# Altium PCB smucF.PcbDoc
Units mm, origin at the board's own origin, x right, y up, seen from the top; angles counter-clockwise.
Board outline 49.53 x 193.04 mm, 2 copper layers (Top, Bottom), stack 1.67 mm thick; 44 components, 97 nets, 390 pads, 152 vias.
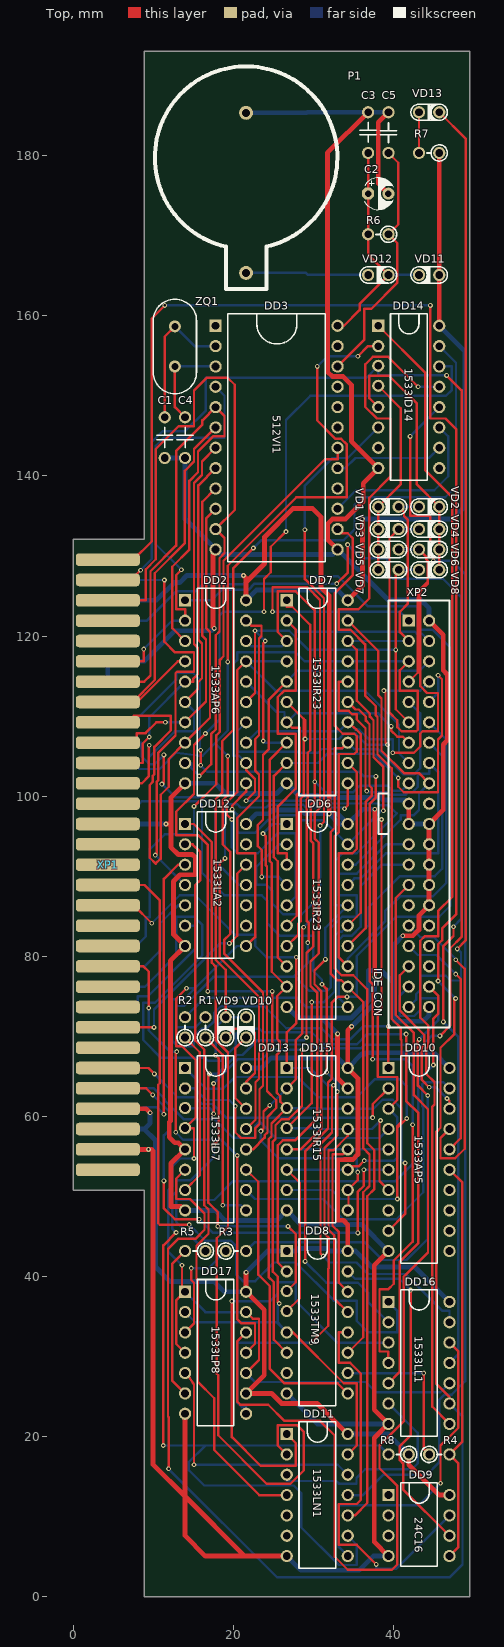
[diagram p0: Top view]
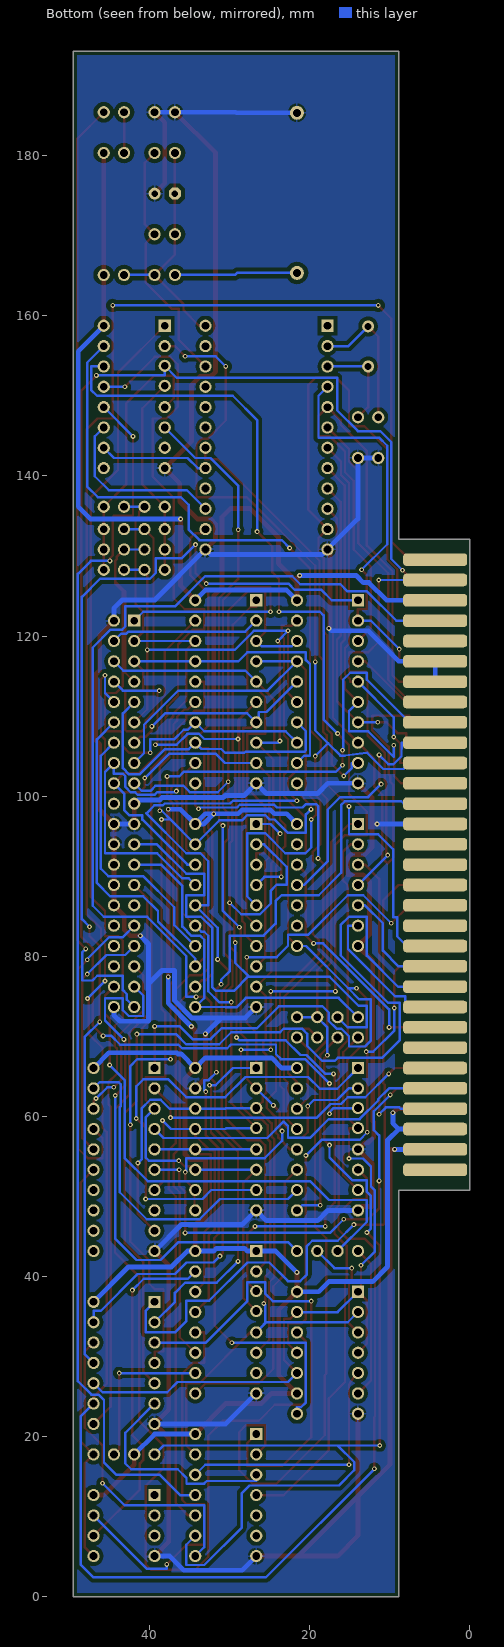
[diagram p1: Bottom view, seen from below]

## Layer stack, top to bottom
Top Solder: solder mask 0.01, Solder Resist, Dk 3.5
Top: signal copper 0.035
Dielectric 1: dielectric 1.6, FR-4, Dk 4.8
Bottom: signal copper 0.035
Bottom Solder: solder mask 0.01, Solder Resist, Dk 3.5

## Board outline
0,50.8 8.89,50.8 8.89,0 49.53,0 49.53,193.04 8.89,193.04 8.89,132.08 0,132.08 0,118.872 0,117.348

## Design rules (kind name [scope] priority, off if disabled: settings)
Clearance [All] p1: gap=0.2 except(0.5: Arc-Poly Track-Poly SMDPad-Poly THPad-Poly Via-Poly Fill-Poly Poly-Poly)
ComponentClearance DG126 [HasFootprint('DG126') vs HasFootprint('DG126')] p1: gap=-1 collisioncheckmode=3 verticalgap=0.2 showdistances=FALSE
ComponentClearance [All] p2: gap=0.3 collisioncheckmode=3 verticalgap=0.2 showdistances=FALSE
HoleSize [All] p1: absolutevalues=TRUE maxlimit=6.3 minlimit=0.2 maxpercent=80.000 minpercent=20.000
HoleToHoleClearance [All] p1: gap=0.4 allowstackedmicrovias=TRUE
MinimumSolderMaskSliver [All] p1: minsoldermaskwidth=0.1
PlaneConnect Via_Plane_Connect [(ObjectKind = 'Via')] p1: planeconnectstyle=Direct reliefexpansion=0.508 reliefentries=4 reliefconductorwidth=0.254 reliefairgap=0.254
PlaneConnect [All] p2: planeconnectstyle=Relief reliefexpansion=0.508 reliefentries=4 reliefconductorwidth=0.254 reliefairgap=0.254
PolygonConnect Via_Poly_Connect [(ObjectKind = 'Via')] p1: connectstyle=Direct reliefconductorwidth=0.254 reliefentries=4 polygonreliefangle="90 Angle" airgapwidth=0.254
PolygonConnect [All] p2: connectstyle=Relief reliefconductorwidth=0.254 reliefentries=4 polygonreliefangle="90 Angle" airgapwidth=0.254
RoutingVias [All] p1: holewidth=0.3 width=0.6 viastyle="Through Hole" minholewidth=0.3 minwidth=0.6 maxholewidth=0.3 maxwidth=0.6
SilkToSilkClearance [All] p1: silktosilkclearance=0.1
SilkToSolderMaskClearance [IsPad] p1: minsilkscreentomaskgap=0.1 clearancetoexposedcopper=TRUE
SolderMaskExpansion [All] p1: expansion=0.102
Width Width_2 [InNet('GND')] p1: maxlimit=0.6 minlimit=0.6 preferedwidth=0.6
Width [InNet('+5V')] p2: maxlimit=0.6 minlimit=0.6 preferedwidth=0.6
Width Width_3 [InNet('+12V')] p3: maxlimit=1 minlimit=1 preferedwidth=1
Width Width_1 [All] p4: maxlimit=0.3 minlimit=0.3 preferedwidth=0.3
23 further rules are at their usual default settings.

## Components (designator, comment, footprint, x,y, rotation, side; value= is the part's Value field where it differs from the comment)
C1 "K10-17_75" K10-17_75 11.43,147.32 r270 top
C2 "" El-d4-h7-F2.54 38.1,175.26 r180 top
C3 "K10-17_75" K10-17_75 36.83,185.42 r270 top
C4 "K10-17_75" K10-17_75 13.97,147.32 r270 top
C5 "K10-17_75" K10-17_75 39.37,180.34 r90 top
DD2 "1533AP6" DIP20 13.97,124.46 r0 top
DD3 "512VI1" DIP24_15 17.78,158.75 r0 top
DD6 "1533IR23" DIP20 26.67,96.52 r0 top
DD7 "1533IR23" DIP20 26.67,124.46 r0 top
DD8 "1533TM9" DIP16 26.67,43.18 r0 top
DD9 "24C16" DIP8 39.37,12.7 r0 top
DD10 "1533AP5" DIP20 39.37,66.04 r0 top
DD11 "1533LN1" DIP14 26.67,20.32 r0 top
DD12 "1533LA2" DIP14 13.97,96.52 r0 top
DD13 "1533ID7" DIP16 13.97,66.04 r0 top
DD14 "1533ID14" DIP16 38.1,158.75 r0 top
DD15 "1533IR15" DIP16 26.67,66.04 r0 top
DD16 "1533LL1" DIP14 39.37,36.83 r0 top
DD17 "1533LP8" DIP14 13.97,38.1 r0 top
P1 "BAT" BH810 21.59,165.354 r180 top
R1 "R0125-2_5" R0125-2_5 16.51,72.39 r270 top
R2 "R0125-2_5" R0125-2_5 13.97,72.39 r270 top
R3 "R0125-2_5" R0125-2_5 21.59,43.18 r180 top
R4 "R0125-2_5" R0125-2_5 46.99,17.78 r180 top
R5 "R0125-2_5" R0125-2_5 13.97,43.18 r0 top
R6 "R0125-2_5" R0125-2_5 36.83,170.18 r0 top
R7 "R0125-2_5" R0125-2_5 43.18,180.34 r0 top
R8 "R0125-2_5" R0125-2_5 39.37,17.78 r0 top
VD1 "KD522-2_5" KD522-2_5 40.64,136.144 r180 top
VD2 "KD522-2_5" KD522-2_5 43.18,136.144 r0 top
VD3 "KD522-2_5" KD522-2_5 40.64,133.35 r180 top
VD4 "KD522-2_5" KD522-2_5 43.18,133.35 r0 top
VD5 "KD522-2_5" KD522-2_5 40.64,130.81 r180 top
VD6 "KD522-2_5" KD522-2_5 43.18,130.81 r0 top
VD7 "KD522-2_5" KD522-2_5 40.64,128.27 r180 top
VD8 "KD522-2_5" KD522-2_5 43.18,128.27 r0 top
VD9 "KD522-2_5" KD522-2_5 19.05,72.39 r270 top
VD10 "KD522-2_5" KD522-2_5 21.59,72.39 r270 top
VD11 "KD522-2_5" KD522-2_5 45.72,165.1 r180 top
VD12 "KD522-2_5" KD522-2_5 36.83,165.1 r0 top
VD13 "LED" KD522-2_5 43.18,185.42 r0 top
XP1 "SCORP EDGE" SCORPION 4.318,129.54 r0 top
XP2 "IDE_CON" IDE_CON 41.91,121.92 r0 top
ZQ1 "RK169MD" RK169MD 12.7,153.67 r90 top

## Footprints (in the part's own frame and the unit in brackets; to place one, negate y for a bottom-side part, rotate by r counter-clockwise, add the part's x,y. Pads: shape width x height; smd on the part's side, far side on the other; paste and mask are expansions set on the pad)
BH810 [mm]
  round 1.75 hole 1: 1(0,0) 2(0,-20)
  silkscreen extent -11.4,-25.8 11.4,2, body extent -11.5,-25.61 11.5,2.39, height 8.5
DIP8 [mil]
  rect 60x60 hole 38: 1(0,0)
  round 60 hole 38: 2(0,-100) 3(0,-200) 4(0,-300) 5(300,-300) 6(300,-200) 7(300,-100) 8(300,0)
  silkscreen extent 60,-350 240,60
DIP14 [mil]
  rect 60x60 hole 38: 1(0,0)
  round 60 hole 38: 2(0,-100) 3(0,-200) 4(0,-300) 5(0,-400) 6(0,-500) 7(0,-600) 8(300,-600) 9(300,-500) 10(300,-400) 11(300,-300) 12(300,-200) 13(300,-100) 14(300,0)
  silkscreen extent 60,-660 240,60
DIP16 [mil]
  rect 60x60 hole 38: 1(0,0)
  round 60 hole 38: 2(0,-100) 3(0,-196.85) 4(0,-295.28) 5(0,-400) 6(0,-500) 7(0,-600) 8(0,-700) 9(300,-700) 10(300,-600) 11(300,-500) 12(300,-400) 13(300,-300) 14(300,-200) 15(300,-100) 16(300,0)
  silkscreen extent 60,-760 240,60
DIP20 [mil]
  rect 60x60 hole 38: 1(0,0)
  round 60 hole 38: 2(0,-100) 3(0,-200) 4(0,-300) 5(0,-400) 6(0,-500) 7(0,-600) 8(0,-700) 9(0,-800) 10(0,-900) 11(300,-900) 12(300,-800) 13(300,-700) 14(300,-600) 15(300,-500) 16(300,-400) 17(300,-300) 18(300,-200) 19(300,-100) 20(300,0)
  silkscreen extent 60,-960 240,60
DIP24_15 [mil]
  rect 60x60 hole 38: 1(0,0)
  round 60 hole 38: 2(0,-100) 3(0,-200) 4(0,-300) 5(0,-400) 6(0,-500) 7(0,-600) 8(0,-700) 9(0,-800) 10(0,-900) 11(0,-1000) 12(0,-1100) 13(600,-1100) 14(600,-1000) 15(600,-900) 16(600,-800) 17(600,-700) 18(600,-600) 19(600,-500) 20(600,-400) 21(600,-300) 22(600,-200) 23(600,-100) 24(600,0)
  silkscreen extent 60,-1160 540,60
El-d4-h7-F2.54 [mm]
  oct 1.5x1.5 hole 0.8: 1(1.27,0)
  round 1.5 hole 0.8: 2(-1.27,0)
  silkscreen extent -1.93,-2 1.75,2, body extent -2.03,-2.03 2.03,2.03, height 7.27
IDE_CON [mil]
  rect 60x60 hole 37.99: 1(0,0)
  round 60 hole 37.99: 2(100,0) 3(0,-100) 4(100,-100) 5(0,-200) 6(100,-200) 7(0,-300) 8(100,-300) 9(0,-400) 10(100,-400) 11(0,-500) 12(100,-500) 13(0,-600) 14(100,-600) 15(0,-700) 16(100,-700) 17(0,-800) 18(100,-800) 19(0,-900) 20(100,-900) 21(0,-1000) 22(100,-1000) 23(0,-1100) 24(100,-1100) 25(0,-1200) 26(100,-1200) 27(0,-1300) 28(100,-1300) 29(0,-1400) 30(100,-1400) 31(0,-1500) 32(100,-1500) 33(0,-1600) 34(100,-1600) 35(0,-1700) 36(100,-1700) 37(0,-1800) 38(100,-1800) 39(0,-1900) 40(100,-1900)
  silkscreen extent -150,-2000 200,100
K10-17_75 [mil]
  round 60 hole 38: 1(0,0) 2(200,0)
  silkscreen extent 50,-40 148,40
KD522-2_5 [mil]
  round 60 hole 38: 1(0,0) 2(100,0)
  silkscreen extent -40,-40 140,40
R0125-2_5 [mil]
  round 60 hole 38: 1(0,0) 2(100,0)
  silkscreen extent 40,-40 140,40
RK169MD [mm]
  round 1.5 hole 0.9: 1(0,0) 2(5,0)
  silkscreen extent -3.4,-2.7 8.4,2.7
SCORPION [mm]
  rrect50% 8x1.57 smd far side: 1(0,0) 2(0,-2.54) 3(0,-5.08) 4(0,-7.62) 5(0,-10.16) 6(0,-12.7) 7(0,-15.24) 8(0,-17.78) 9(0,-20.32) 10(0,-22.86) 11(0,-25.4) 12(0,-27.94) 13(0,-30.48) 14(0,-33.02) 15(0,-35.56) 16(0,-38.1) 17(0,-40.64) 18(0,-43.18) 19(0,-45.72) 20(0,-48.26) 21(0,-50.8) 22(0,-53.34) 23(0,-55.88) 24(0,-58.42) 25(0,-60.96) 26(0,-63.5) 27(0,-66.04) 28(0,-68.58) 29(0,-71.12) 30(0,-73.66) 31(0,-76.2)
  rrect50% 8x1.57 smd: 32(0,0) 33(0,-2.54) 34(0,-5.08) 35(0,-7.62) 36(0,-10.16) 37(0,-12.7) 38(0,-15.24) 39(0,-17.78) 40(0,-20.32) 41(0,-22.86) 42(0,-25.4) 43(0,-27.94) 44(0,-30.48) 45(0,-33.02) 46(0,-35.56) 47(0,-38.1) 48(0,-40.64) 49(0,-43.18) 50(0,-45.72) 51(0,-48.26) 52(0,-50.8) 53(0,-53.34) 54(0,-55.88) 55(0,-58.42) 56(0,-60.96) 57(0,-63.5) 58(0,-66.04) 59(0,-68.58) 60(0,-71.12) 61(0,-73.66) 62(0,-76.2)

## Part data
C2: library part K50-35_75PNT
P1: library part "Header 2"
VD13: library part KD522-2_5
XP1: library part "SCOR EDGE"

## Via types
v1: diameter 0.6, hole 0.3, Top to Bottom, tented both sides, 152 vias

## Nets (pads, with @x,y where several pads share a name; then routed paths per layer and width w, separated by ;. In a path a pad name is that pad's centre, name@x,y a point inside that pad or via, vN(x,y) a via of type N, cw(c..) or ccw(c..) an arc to the next point about the centre after c; other vN are vias at no path point)
+5V: DD2.20 DD6.20 DD7.20 DD8.1 DD8.16 DD9.8 DD10.20 DD11.14 DD12.14 DD13.16 DD14.16 DD15.16 DD16.14 DD17.9 DD17.14 R7.2 R8.2 VD11.1 XP1.3 XP1.29 XP1.59 | length 388.1
  Top w0.6: XP1.59 9.093,60.96 v1(9.601,60.452) ; v1(21.26,127.559) 21.59,127.229 21.59,126.746 ; v1(21.59,40.513) DD17.14 23.852,35.838 23.852,27.662 DD17.9 24.765,25.4 26.027,24.138 30.472,24.138 DD11.14 ; DD2.20 21.59,126.746 ; v1(31.975,97.777) 31.975,125.048 30.937,126.086 30.937,134.874 29.88,135.932 27.464,135.932 23.901,132.37 23.901,129.057 21.59,126.746 ; DD8.16 34.29,46.482 33.757,47.015 33.028,47.015 33.028,54.585 33.833,54.585 33.858,54.61 34.925,54.61 35.56,55.245 35.56,64.77 DD15.16 34.29,70.744 v1(34.773,71.226) ; DD7.20 36.119,126.289 v1(36.119,134.62) ; v1(37.668,77.419) v1(37.668,98.374) ; R8.2 41.91,16.51 45.72,12.7 DD9.8 ; DD14.16 VD11.1 R7.2
  Bottom w0.6: XP1.29 8.89,58.42 ; XP1.3 10.389,124.46 12.598,126.67 13.31,126.67 14.199,127.559 v1(21.26,127.559) ; v1(9.601,60.452) 9.601,59.131 8.89,58.42 ; DD17.14 18.872,38.1 17.602,39.37 12.141,39.37 10.262,41.25 10.262,57.048 8.89,58.42 ; v1(21.59,40.513) 24.257,43.18 DD8.1 27.795,43.18 28.126,43.511 31.67,43.511 32.002,43.18 DD8.16 35.274,43.18 37.268,41.186 42.634,41.186 DD16.14 ; DD13.16 23.47,66.04 24.74,67.31 33.02,67.31 DD15.16 36.052,67.802 36.43,67.802 36.578,67.95 45.08,67.95 DD10.20 ; DD12.14 22.86,97.79 24.416,97.79 24.908,98.282 28.432,98.282 28.924,97.79 33.02,97.79 DD6.20 ; DD2.20 22.86,125.73 33.02,125.73 DD7.20 ; v1(31.975,97.777) 33.233,96.52 DD6.20 ; DD11.14 39.37,20.32 R8.2 ; v1(34.773,71.226) 37.668,74.122 v1(37.668,77.419) ; v1(36.119,134.62) 47.379,134.62 48.903,136.144 48.903,155.567 DD14.16 ; v1(37.668,98.374) 36.144,98.374 DD6.20
/DOS: DD16.2 XP1.4 | length 153.2
  Top w0.3: v1(28.956,41.885) 28.956,55.62 31.819,58.483 31.819,64.244 32.309,64.733 32.309,74.219 33.02,74.93 v1(34.188,74.93)
  Bottom w0.3: XP1.4 9.195,121.92 12.852,125.578 15.265,125.578 16.154,126.467 21.184,126.467 22.174,127.457 33.071,127.457 36.83,123.698 43.028,123.698 43.028,121.183 43.409,120.802 44.856,120.802 47.092,118.567 47.092,86.309 45.72,84.938 40.31,84.938 35.408,80.035 35.408,74.93 v1(34.188,74.93) ; v1(28.956,41.885) 31.623,39.218 35.56,39.218 36.83,37.948 36.83,36.83 DD16.2
A0: DD16.4 XP1.9 | length 129.9
  Top w0.3: v1(15.9,103.861) v1(15.9,105.74) ; v1(37.389,67.132) 37.389,76.53 37.018,76.901 37.018,99.035 37.804,99.82 v1(37.804,102.464) ; DD16.4 39.37,30.632 38.258,30.632 38.258,38.43 39.37,38.43 40.03,39.091 40.03,41.986 42.393,44.348 v1(42.393,58.953)
  Bottom w0.3: XP1.9 7.544,109.22 12.852,114.529 12.852,115.418 14.935,115.418 15.799,114.554 15.799,105.842 v1(15.9,105.74) ; v1(15.9,103.861) 16.739,103.022 35.738,103.022 36.297,102.464 v1(37.804,102.464) ; v1(37.389,67.132) 37.409,67.152 41.535,67.152 42.393,66.294 v1(42.393,58.953)
A1: DD12.11 XP1.10 | length 32.8
  Top w0.3: v1(11.074,101.498) 11.328,101.752 v1(11.328,105.156)
  Bottom w0.3: XP1.10 8.484,106.68 8.534,104.978 9.525,103.988 10.16,103.988 v1(11.328,105.156) ; v1(11.074,101.498) 12.7,99.873 16.18,99.873 17.755,98.298 17.755,91.845 20.7,88.9 DD12.11
A2: DD13.2 DD14.2 XP1.11 | length 149.9
  Top w0.3: v1(19.304,105.004) 19.304,100.125 18.678,99.499 18.678,93.971 19.609,93.04 19.609,82.779 18.847,82.017 18.847,80.34 23.702,75.485 23.702,63.83 23.258,63.387 23.258,59.055 22.708,58.504 22.708,57.302 20.955,57.302 20.244,58.014 v1(20.244,61.29) ; v1(19.304,116.764) 19.304,128.768 27.849,137.312 34.138,137.312 34.138,143.965 33.475,144.628 32.766,144.628 30.48,146.914 v1(30.48,153.67) ; v1(35.56,154.94) 36.83,156.21 DD14.2
  Bottom w0.3: XP1.11 7.544,104.14 8.289,103.395 10.812,103.395 12.827,105.41 15.583,105.069 16.169,105.069 17.704,106.604 ; DD13.2 15.143,63.5 16.597,62.045 19.489,62.045 v1(20.244,61.29) ; v1(19.304,105.004) 17.704,106.604 ; v1(19.304,116.764) 19.304,108.204 17.704,106.604 ; v1(30.48,153.67) 31.75,154.94 v1(35.56,154.94)
A5: DD12.6 XP1.23 | length 18.8
  Bottom w0.3: XP1.23 7.976,73.66 8.067,73.751 8.067,75.005 9.321,75.005 15.215,80.899 15.215,83.82 DD12.6
A6: DD16.5 XP1.22 | length 120.6
  Top w0.3: DD16.5 40.762,28.062 40.762,41.824 43.106,44.167 43.106,60.406 41.58,61.932 v1(41.58,70.282)
  Bottom w0.3: XP1.22 8.966,76.2 12.852,80.086 12.852,84.938 15.088,84.938 16.129,83.896 16.129,80.13 10.182,74.183 8.738,74.183 8.738,69.545 10.973,67.31 16.485,67.31 16.84,66.954 18.448,66.954 20.295,68.801 20.295,70.307 20.955,70.968 23.241,70.968 23.698,70.51 29.794,70.51 31.293,69.012 35.428,69.012 36.698,70.282 v1(41.58,70.282)
A7: DD12.5 XP1.21 | length 14.8
  Bottom w0.3: XP1.21 8.89,78.74 10.859,80.709 10.859,84.128 13.091,86.36 DD12.5
A8: DD10.2 XP1.57 | length 40.1
  Top w0.3: XP1.57 9.401,66.04 v1(10.135,65.306) ; v1(37.389,59.848) 37.389,61.519 DD10.2
  Bottom w0.3: v1(10.135,65.306) 13.058,62.382 15.242,62.382 16.079,61.545 17.387,61.545 19.084,59.848 v1(37.389,59.848)
A9: DD10.4 XP1.27 | length 40.7
  Bottom w0.3: XP1.27 10.084,63.5 11.429,62.154 11.429,62.002 13.767,59.665 17.621,59.665 19.978,57.308 22.702,57.308 22.702,58.797 23.253,59.348 25.298,57.302 38.252,57.302 DD10.4
A10: DD10.6 XP1.58 | length 58
  Top w0.3: XP1.58 9.119,63.5 v1(9.931,62.687) ; v1(11.328,51.943) 11.328,48.514 12.7,47.142 v1(15.748,47.142) ; v1(35.56,45.441) 35.56,50.597 36.304,51.34 v1(36.304,53.34)
  Bottom w0.3: v1(9.931,62.687) 11.989,60.63 11.989,58.293 11.328,57.633 v1(11.328,51.943) ; v1(15.748,47.142) 17.45,45.441 v1(35.56,45.441) ; v1(36.304,53.34) DD10.6
A11: DD12.3 XP1.28 | length 40.2
  Top w0.3: v1(11.328,60.274) 11.328,89.662 13.106,91.44 DD12.3
  Bottom w0.3: XP1.28 8.642,60.96 8.808,61.126 10.477,61.126 v1(11.328,60.274)
A12: DD12.4 XP1.2 | length 52.9
  Top w0.3: v1(10.236,92.634) 10.419,92.817 10.419,101.78 10.637,101.998 10.637,105.429 12.776,107.569 12.776,115.341 12.979,115.545 15.082,115.545 15.082,117.958 12.7,117.958 11.379,119.278 v1(11.379,127)
  Bottom w0.3: XP1.2 v1(11.379,127) ; v1(10.236,92.634) DD12.4
A13: DD13.3 DD14.3 XP1.33 | length 189.5
  Top w0.3: XP1.33 7.188,127 v1(8.407,128.219) ; v1(17.526,60.325) v1(17.526,64.11) ; v1(45.796,70.053) 47.092,71.349 47.092,81.001 48.506,82.415 48.506,150.681 v1(46.634,152.552)
  Bottom w0.3: v1(8.407,128.219) 9.804,129.616 9.804,144.221 11.176,145.593 13.97,145.593 16.561,148.184 16.561,152.248 36.598,152.248 DD14.3 38.1,152.552 v1(46.634,152.552) ; DD13.3 17.005,61.04 17.526,60.519 v1(17.526,60.325) ; v1(17.526,64.11) 20.574,67.158 23.597,67.158 24.206,67.767 24.206,68.976 29.83,68.976 30.302,68.504 35.928,68.504 36.38,68.956 43.657,68.956 44.755,70.053 v1(45.796,70.053)
A15: DD13.6 DD16.9 XP1.32 | length 320.1
  Top w0.3: XP1.32 7.544,129.54 9.804,131.801 9.804,159.664 v1(11.43,161.29) ; v1(11.913,15.977) 11.913,22.428 11.836,22.504 11.836,43.434 13.096,44.694 15.26,44.694 16.398,45.832 16.398,47.849 14.565,49.682 12.858,49.682 12.858,52.228 DD13.6 ; v1(44.608,161.29) 44.608,147.168 46.507,147.168 47.862,145.813 47.862,85.276 46.068,83.482 46.068,81.991 45.568,81.491 v1(45.568,76.911) ; DD16.9 46.99,24.943 45.364,26.568 45.364,58.064 45.872,58.572 45.872,68.572 47.608,70.307 47.608,74.582 v1(47.752,74.727)
  Bottom w0.3: v1(11.43,161.29) v1(44.608,161.29) ; v1(11.913,15.977) 25.476,2.413 46.99,2.413 48.616,4.039 48.616,22.504 DD16.9 ; v1(45.568,76.911) v1(47.752,74.727)
AB0: DD10.18 XP2.35 | length 21.5
  Top w0.3: XP2.35 40.792,77.622 40.792,73.205 43.856,70.142 43.856,68.971 43.545,68.661 43.545,64.557 v1(44.475,63.627) ; v1(46.687,62.23) 46.99,61.927 DD10.18
  Bottom w0.3: v1(44.475,63.627) 45.29,63.627 v1(46.687,62.23)
AB1: DD10.16 XP2.33 | length 30.1
  Top w0.3: DD10.16 48.402,57.292 48.402,77.152 v1(47.777,77.777)
  Bottom w0.3: XP2.33 43.028,80.162 45.392,80.162 v1(47.777,77.777)
AB2: DD10.14
AS: DD3.14 DD11.10 | length 134.4
  Top w0.3: DD3.14 33.53,132.84 34.29,132.84 34.932,132.198 34.932,127.631 32.678,125.377 32.678,108.775 33.655,107.798 35.091,107.798 35.402,107.487 35.402,105.568 35.092,105.258 33.173,105.258 33.173,95.524 32.646,94.997 32.646,78.499 33.523,77.622 34.973,77.622 36.728,75.867 36.728,56.655 37.62,55.763 37.62,50.924 36.728,50.033 36.728,11.704 35.185,10.16 DD11.10
CS0: R3.1 XP2.37 | length 67.5
  Top w0.3: v1(43.205,69.621) 43.045,69.461 43.045,63.838 v1(44.272,62.611)
  Bottom w0.3: R3.1 22.708,44.298 36.398,44.298 38.633,42.062 41.631,42.062 44.272,44.704 v1(44.272,62.611) ; XP2.37 40.792,75.082 40.792,72.542 42.601,72.542 43.338,73.279 43.338,74.778 45.568,74.778 45.568,71.984 v1(43.205,69.621)
CS1: R5.2 XP2.38 | length 63.2
  Top w0.3: XP2.38 45.568,75.082 45.568,72.796 44.983,72.212 v1(44.983,66.418)
  Bottom w0.3: R5.2 12.852,46.838 12.852,49.555 17.602,49.555 19.964,51.918 40.234,51.918 43.112,54.796 43.112,64.547 v1(44.983,66.418)
CSM: DD2.19 DD10.1 DD12.8 DD13.4 DD16.10 DD17.1 DD17.4 DD17.10 DD17.13 | length 201.4
  Top w0.3: v1(13.589,41.402) 13.589,38.481 DD17.1 12.852,36.982 12.852,31.598 DD17.4 ; v1(14.147,75.996) 12.852,74.701 12.852,68.758 13.589,68.758 15.309,67.038 15.309,59.879 DD13.4 15.088,58.54 v1(15.088,54.737) ; DD17.10 23.202,29.552 23.202,34.737 22.413,34.737 DD17.13 ; DD12.8 22.708,82.398 22.708,92.868 20.478,92.868 20.478,97.264 23.202,99.988 23.202,102.718 22.708,103.212 22.708,107.114 23.202,107.608 23.202,119.692 23.51,120 23.51,121.3 22.21,121.3 DD2.19 ; DD10.1 v1(39.37,71.246)
  Bottom w0.3: v1(13.589,41.402) 11.852,43.139 11.852,50.755 12.344,51.247 12.344,53.746 13.335,54.737 v1(15.088,54.737) ; DD17.1 16.51,35.56 DD17.13 ; v1(14.147,75.996) 15.188,75.996 ; DD17.10 22.708,26.822 36.525,26.822 37.795,25.552 45.872,25.552 DD16.10 ; DD12.8 20.472,81.28 15.188,75.996 ; v1(39.37,71.246) 36.21,71.246 34.622,69.657 32.37,69.657 31.014,71.013 26.599,71.013 23.851,73.762 18.415,73.762 17.622,72.969 17.622,71.929 16.655,70.962 16.049,70.962 15.088,70 15.088,68.732 13.089,68.732 12.352,69.469 12.352,74.626 13.819,74.626 15.188,75.996
D0: DD2.2 DD3.4 XP1.37 | length 53
  Top w0.3: XP1.37 8.814,116.84 v1(8.814,118.364) ; v1(13.513,128.27) 12.858,127.615 12.858,123.348 13.97,123.348 DD2.2
  Bottom w0.3: v1(8.814,118.364) 12.37,121.92 DD2.2 ; v1(13.513,128.27) 10.312,131.47 10.312,143.764 11.328,144.78 18.898,144.78 18.898,150.012 DD3.4
D1: DD2.3 DD3.5 XP1.38 | length 76.4
  Top w0.3: XP1.38 8.865,114.3 9.652,115.087 9.652,128.092 12.852,131.293 12.852,143.129 16.129,146.406 16.129,146.939 DD3.5 18.898,147.472 18.898,144.932 17.475,144.932 15.582,143.039 15.582,140.448 14.503,139.37 14.503,130.791 12.358,128.645 12.358,120.992 DD2.3
D2: DD2.4 DD3.6 XP1.39 | length 50.3
  Top w0.3: XP1.39 XP1.39@7.442,111.76 ; DD2.4 13.075,116.84 7.995,111.76 XP1.39@7.442,111.76 ; DD3.6 15.082,143.352 15.082,141.779 13.945,140.642 13.945,131.597 10.185,127.838 10.185,114.503 XP1.39@7.442,111.76
D3: DD2.5 DD3.7 XP1.42 | length 48.5
  Top w0.3: XP1.42 8.687,104.14 8.687,106.578 v1(9.5,107.391) ; DD2.5 14.964,114.3 14.964,114.61 15.582,115.228 15.582,118.497 15.082,118.997 15.082,139.103 16.082,140.103 16.082,141.812 DD3.7
  Bottom w0.3: v1(9.5,107.391) 9.5,109.83 DD2.5
D4: DD2.6 DD3.8 XP1.43 | length 53
  Top w0.3: XP1.43 8.56,101.6 9.419,102.459 9.419,106.269 v1(9.5,106.35) ; DD2.6 15.582,113.372 15.582,114.228 16.082,114.728 16.082,119.045 15.63,119.497 15.63,138.82 DD3.8
  Bottom w0.3: v1(9.5,106.35) 9.5,104.902 12.7,108.102 15.088,108.102 15.088,110.642 DD2.6
D5: DD2.7 DD3.9 XP1.41 | length 42.6
  Top w0.3: XP1.41 7.95,106.68 7.95,107.874 9.042,107.874 10.389,109.22 v1(11.506,109.22) ; DD2.7 16.582,111.832 16.582,119.545 16.13,119.997 16.13,136.78 DD3.9
  Bottom w0.3: v1(11.506,109.22) DD2.7
D6: DD2.8 DD3.10 XP1.40 | length 76.3
  Top w0.3: XP1.40 7.544,109.22 7.544,110.033 12.182,110.033 12.182,108.197 10.136,106.152 10.136,102.741 9.919,102.523 9.919,101.761 9.55,101.393 9.55,92.304 10.287,91.567 10.922,92.202 10.922,100.174 11.92,101.171 11.92,104.63 DD2.8 17.082,109.792 17.082,120.497 16.63,120.949 16.63,134.74 DD3.10
D7: DD2.9 DD3.11 XP1.34 | length 95.1
  Top w0.3: XP1.34 9.068,124.46 9.068,128.346 10.312,129.591 10.312,143.358 13.157,146.202 15.088,146.202 15.088,150.673 16.662,152.248 19.304,152.248 20.168,151.384 20.168,135.738 DD3.11 18.898,132.232 18.898,130.355 18.263,129.72 18.263,120.548 17.805,120.091 17.805,108.331 17.226,107.752 17.226,103.992 v1(15.748,102.514)
  Bottom w0.3: DD2.9 14.732,104.14 14.732,103.53 v1(15.748,102.514)
DB0: DD2.18 DD6.2 DD7.3 DD8.3 XP2.17 | length 153.8
  Top w0.3: v1(17.018,65.303) 16.866,65.151 16.866,49.225 18.059,48.031 v1(18.059,46.253) ; DD8.3 27.782,39.292 27.782,45.294 v1(26.822,46.253) ; DD7.3 25.552,120.498 25.552,125.578 27.782,125.578 30.175,123.184 v1(30.175,101.803) 30.175,99.438 29.686,98.948 29.686,94.405 29.997,94.093 v1(29.997,86.69) 29.997,81.255 29.134,80.391 v1(29.134,69.85)
  Bottom w0.3: v1(17.018,65.303) 18.013,65.303 20.375,67.666 21.158,67.666 22.987,69.494 28.778,69.494 v1(29.134,69.85) ; v1(18.059,46.253) v1(26.822,46.253) ; DD2.18 22.24,118.73 26.02,118.73 DD7.3 ; DD6.2 25.689,93.98 22.885,91.176 22.885,88.925 24.13,88.925 24.841,88.214 24.841,86.614 26.213,85.242 28.55,85.242 v1(29.997,86.69) ; v1(30.175,101.803) 31.491,100.488 34.961,100.488 35.761,101.288 39.277,101.288 39.902,100.663 40.973,100.663 XP2.17
DB1: DD2.17 DD6.5 DD7.4 XP2.15 | length 76
  Top w0.3: v1(19.798,97.078) 19.178,97.698 19.178,99.195 20.472,100.49 20.472,115.722 DD2.17
  Bottom w0.3: v1(19.798,97.078) 19.798,93.599 20.529,92.868 23.048,92.868 25.557,95.377 27.788,95.377 27.788,87.478 DD6.5 ; DD7.4 DD2.17 25.248,113.182 36.419,113.182 40.691,108.91 40.691,105.359 XP2.15
DB2: DD2.16 DD6.6 DD7.7 XP2.13 | length 52.6
  Top w0.3: DD6.6 27.916,85.066 27.916,100.19 28.282,100.557 28.282,108.526 27.364,108.526 DD7.7 ; v1(39.7,108.712) 39.7,108.204 40.462,107.442 41.148,107.442 XP2.13
  Bottom w0.3: DD2.16 25.385,110.505 26.383,110.505 26.383,109.507 DD7.7 27.788,110.338 38.075,110.338 v1(39.7,108.712)
DB3: DD2.15 DD6.9 DD7.8 DD8.6 DD10.9 DD15.3 DD15.14 VD7.1 VD8.1 XP2.11 | length 180.7
  Top w0.3: DD2.15 22.702,112.872 v1(22.702,120.65) ; v1(23.724,106.883) 23.724,119.126 v1(23.978,119.38) ; DD8.6 25.058,32.092 25.058,39.284 24.401,39.941 24.401,57.141 24.759,57.498 24.759,59.129 DD15.3 25.864,61.846 25.864,62.516 25.408,62.973 25.408,67.676 25.783,68.05 25.783,69.372 25.487,69.667 25.487,75.017 DD6.9 24.798,78.073 24.798,91.628 24.558,91.868 24.558,104.568 DD7.8 ; DD10.9 41.453,47.803 v1(41.453,54.178) ; VD7.1 40.284,128.27 v1(40.284,118.262) 40.284,110.846 XP2.11
  Bottom w0.3: v1(23.724,106.883) 23.927,106.68 DD7.8 ; v1(23.978,119.38) 23.972,119.38 v1(22.702,120.65) 26.975,120.65 29.362,118.262 v1(40.284,118.262) ; DD15.3 30.429,61.04 30.509,60.96 DD15.14 37.507,60.96 38.625,62.078 39.903,62.078 40.996,60.985 40.996,54.635 v1(41.453,54.178) ; VD7.1 VD8.1
DB4: DD2.14 DD6.12 DD7.13 DD8.11 XP2.9 | length 119.3
  Top w0.3: DD8.11 36.22,32.41 36.22,50.533 37.002,51.315 37.002,55.261 36.22,56.042 36.22,74.27 DD6.12 33.467,77.023 32.962,77.023 32.146,77.839 32.146,95.497 32.664,96.016 32.664,105.992 33.602,105.992 DD7.13
  Bottom w0.3: DD2.14 20.478,108.108 20.478,105.724 20.634,105.568 27.986,105.568 28.137,105.417 30.567,105.417 31.038,105.888 33.498,105.888 DD7.13 35.096,105.874 38.083,105.874 41.239,102.718 42.545,102.718 43.332,103.505 43.332,110.338 XP2.9
DB5: DD2.13 DD6.15 DD7.14 DD8.13 DD10.7 DD15.4 DD15.13 VD5.1 VD6.1 XP2.7 | length 173.9
  Top w0.3: DD15.4 29.794,61.664 v1(29.794,74.27) ; DD8.13 32.581,37.269 32.581,45.145 31.878,45.848 31.878,55.752 32.467,55.752 34.29,57.575 DD15.13 ; DD6.15 35.911,85.441 35.911,107.754 35.365,108.3 DD7.14 ; v1(38.379,59.487) 38.252,59.36 38.252,51.918 DD10.7 ; v1(39.919,105.41) 42.545,105.41 43.332,106.197 43.332,107.798 43.637,108.102 45.562,108.102 45.562,112.878 44.196,112.878 43.332,113.741 43.332,125.578 44.298,126.543 44.298,126.848 ; XP2.7 43.028,115.418 43.028,125.578 44.298,126.848 ; VD6.1 44.108,129.882 44.108,129.573 44.298,129.384 44.298,126.848
  Bottom w0.3: DD2.13 23.012,108.102 33.172,108.102 DD7.14 35.218,108.292 35.723,108.292 36.934,107.081 39.919,107.081 v1(39.919,105.41) ; DD15.4 30.404,58.54 30.524,58.42 DD15.13 37.313,58.42 v1(38.379,59.487) ; v1(29.794,74.27) 31.307,74.27 32.672,75.635 32.672,82.566 33.164,83.058 33.528,83.058 DD6.15 ; VD5.1 VD6.1
DB6: DD2.12 DD6.16 DD7.17 DD8.14 DD10.5 DD15.5 DD15.12 VD3.1 VD4.1 XP2.5 | length 189.8
  Top w0.3: v1(21.59,99.432) 22.702,100.544 22.702,102.139 21.59,103.251 DD2.12 ; DD15.5 28.405,55.88 30.963,58.437 30.963,75.667 30.134,76.495 30.134,78.242 v1(31.496,79.604) ; DD8.14 33.172,39.218 33.172,45.553 32.378,46.348 32.378,55.252 33.662,55.252 DD15.12 ; VD3.1 39.504,132.214 39.504,110.46 40.476,109.488 40.476,108.622 40.996,108.102 42.838,108.102 43.028,108.292 43.028,113.182 40.798,113.182 40.798,115.728 XP2.5
  Bottom w0.3: v1(21.59,99.432) 29.582,99.432 29.931,99.083 38.102,99.083 38.323,98.863 39.389,98.863 40.401,97.851 35.412,92.862 33.655,92.862 32.664,91.872 32.664,86.36 DD6.16 31.496,83.566 v1(31.496,79.604) ; DD2.12 20.676,105.054 19.964,105.054 19.964,116.484 20.472,116.992 20.472,117.958 27.788,117.958 28.905,116.84 DD7.17 XP2.5 ; DD15.5 DD15.12 DD10.5 ; VD3.1 VD4.1
DB7: DD2.11 DD6.19 DD7.18 DD8.4 DD10.3 DD15.6 DD15.11 VD1.1 VD2.1 XP2.3 | length 161.5
  Top w0.3: v1(19.837,98.349) 19.837,98.806 21.59,100.559 DD2.11 ; DD8.4 28.282,37.292 28.282,51.728 DD15.6 ; DD15.11 34.29,53.746 35.611,53.746 v1(36.347,54.483) ; DD7.18 35.408,118.262 35.408,111.938 37.053,110.293 37.053,109.938 37.504,109.487 37.504,104.863 38.736,103.631 v1(38.736,98.171) ; v1(38.506,97.079) 38.506,73.406 38.049,72.949 38.049,64.922 40.488,64.922 40.488,62.078 DD10.3 ; VD1.1 41.312,135.472 41.312,134.978 41.758,134.532 41.758,123.997 40.798,123.038 40.798,120.492 XP2.3
  Bottom w0.3: v1(19.837,98.349) 20.472,97.714 20.472,95.408 22.708,95.408 24.379,97.079 24.999,97.079 25.552,97.632 27.788,97.632 28.442,96.977 31.293,96.977 DD6.19 37.389,97.079 ; DD15.6 DD15.11 ; DD7.18 XP2.3 ; v1(36.347,54.483) 40.107,54.483 40.488,54.864 40.488,59.842 DD10.3 ; v1(38.506,97.079) 37.389,97.079 ; v1(38.736,98.171) 38.481,98.171 37.389,97.079 ; VD1.1 VD2.1
DB8: DD6.3 DD7.2 XP2.4 | length 55.8
  Top w0.3: DD6.3 26.67,92.868 25.558,92.868 25.558,98.712 27.782,100.936 27.782,107.798 25.552,107.798 25.552,112.37 26.365,113.182 27.788,113.182 27.788,120.802 DD7.2
  Bottom w0.3: DD7.2 28.042,120.548 42.65,120.548 42.896,120.302 43.528,120.302 XP2.4
DB9: DD6.4 DD7.5 XP2.6 | length 48.5
  Top w0.3: v1(23.545,89.916) 23.545,93.265 23.048,93.762 23.048,96.399 23.702,97.052 23.702,105.134 24.435,105.867 24.435,112.065 DD7.5
  Bottom w0.3: v1(23.545,89.916) 25.654,89.916 DD6.4 ; DD7.5 28.042,115.672 43.282,115.672 XP2.6
DB10: DD6.7 DD7.6 XP2.8 | length 59
  Top w0.3: DD6.7 28.118,82.728 28.118,84.085 28.416,84.383 28.416,99.69 28.782,100.057 28.782,109.648 ; DD7.6 28.782,109.648 ; v1(28.956,107.137) 28.956,109.474 28.782,109.648 ; v1(38.795,113.182) 39.004,112.974 39.004,106.691 v1(39.268,106.426)
  Bottom w0.3: v1(28.956,107.137) 33.172,107.137 33.833,107.798 34.671,107.798 34.696,107.772 35.281,107.772 36.627,106.426 v1(39.268,106.426) ; v1(38.795,113.182) 43.332,113.182 XP2.8
DB11: DD6.8 DD7.9 XP2.10 | length 67.5
  Top w0.3: DD6.8 25.552,79.858 25.552,91.873 25.058,92.368 25.058,102.528 DD7.9 ; v1(40.589,102.26) 40.589,101.168 41.275,100.482 45.562,100.482 45.562,107.094 46.062,107.594 46.062,114.593 v1(45.568,115.087)
  Bottom w0.3: DD7.9 30.556,104.14 31.699,105.283 37.567,105.283 v1(40.589,102.26) ; XP2.10 45.568,112.878 v1(45.568,115.087)
DB12: DD6.13 DD7.12 XP2.12 | length 67.1
  Top w0.3: DD6.13 33.172,79.858 33.172,92.868 34.862,92.868 35.411,93.418 35.411,103.019 DD7.12
  Bottom w0.3: DD6.13 34.29,79.705 38.947,84.362 38.947,85.632 40.792,87.478 44.907,87.478 46.584,89.154 46.584,107.086 XP2.12
DB13: DD6.14 DD7.15 XP2.14 | length 66.7
  Top w0.3: DD6.14 36.518,83.508 36.518,99.274 37.304,100.059 37.304,100.988 37.004,101.288 37.004,108.987 36.553,109.438 36.553,109.925 35.662,110.816 35.234,110.816 DD7.15
  Bottom w0.3: DD6.14 36.906,83.896 36.906,86.126 40.798,90.018 45.161,90.018 46.076,90.932 46.076,105.054 XP2.14
DB14: DD6.17 DD7.16 XP2.16 | length 53.2
  Top w0.3: DD7.16 33.178,114.3 33.178,110.642 34.417,110.642 34.849,110.211 35.408,110.211 35.408,109.583 36.504,108.487 36.504,100.784 v1(36.652,100.635)
  Bottom w0.3: DD6.17 35.113,89.723 35.917,89.723 39.056,92.862 45.568,92.862 45.568,103.022 XP2.16 44.45,102.812 43.347,102.812 43.022,102.487 43.022,101.139 42.371,100.488 41.803,100.488 41.478,100.163 39.395,100.163 39.07,100.488 36.652,100.488 v1(36.652,100.635)
DB15: DD6.18 DD7.19 XP2.18 | length 41.5
  Top w0.3: DD7.19 38.11,118.1 38.11,112.575 38.504,112.182 38.504,105.673 41.306,102.87 43.18,102.87 XP2.18
  Bottom w0.3: DD6.18 35.279,91.44 40.901,97.062 40.901,97.638 42.545,97.638 43.18,98.273 43.18,100.33 XP2.18
DIOR: DD6.11 R2.1 XP2.25 | length 46.3
  Bottom w0.3: R2.1 16.383,74.803 27.961,74.803 29.144,73.62 30.444,73.62 30.485,73.66 DD6.11 33.172,74.778 33.172,82.066 33.657,82.55 34.747,82.55 35.902,83.705 35.902,88.759 38.583,91.44 XP2.25
DIOW: DD7.1 R1.1 XP2.23 | length 117.5
  Top w0.3: DD7.1 26.67,123.647 27.356,123.647 29.606,121.397 29.606,105.74 29.286,105.42 29.286,99.657 29.186,99.557 29.186,84.396 29.428,84.153 29.428,81.852 v1(29.286,81.709)
  Bottom w0.3: R1.1 15.24,71.12 12.852,71.12 12.852,73.812 13.894,73.812 17.501,77.419 ; v1(29.286,81.709) 29.286,79.172 27.632,77.517 ; XP2.23 39.065,93.98 35.408,90.322 33.172,90.322 33.172,87.63 35.402,87.63 35.402,84.938 33.579,84.938 32.156,83.515 32.156,76.119 31.714,75.677 29.472,75.677 27.632,77.517 ; 17.501,77.419 27.534,77.419 27.632,77.517 ; 17.501,77.419 27.632,77.517
DIR: DD2.1 DD16.11 | length 141
  Top w0.3: v1(32.918,126.543) 34.265,127.889 v1(34.265,131.42) ; v1(46.228,71.806) 46.228,81.265 47.498,82.535 v1(47.498,83.693)
  Bottom w0.3: DD2.1 17.247,124.46 18.542,125.755 21.869,125.755 22.657,126.543 v1(32.918,126.543) ; v1(34.265,131.42) 35.992,129.692 39.218,129.692 39.218,127.889 39.954,127.152 46.175,127.152 48.446,124.882 48.446,84.641 v1(47.498,83.693) ; v1(46.228,71.806) 48.108,69.926 48.108,30.328 DD16.11
DS: DD3.17 DD14.10 | length 13.8
  Bottom w0.3: DD3.17 33.974,140.97 35.244,142.24 44.45,142.24 DD14.10
FD: DD14.6 DD15.2 DD15.9 DD15.10 | length 118.3
  Top w0.3: v1(23.444,58.166) 23.759,58.48 23.759,60.589 v1(24.536,61.366) ; DD15.2 27.788,64.618 27.788,69.545 28.626,70.383 28.626,83.464 v1(28.778,83.617) ; v1(28.931,133.274) 28.931,127.111 31.325,124.716 31.325,96.807 v1(30.836,96.317) ; DD15.9 34.381,48.351 34.381,50.709 DD15.10 35.535,52.045 v1(35.535,53.035)
  Bottom w0.3: v1(23.444,58.166) 23.444,56.947 25.629,54.762 35.408,54.762 35.408,53.162 v1(35.535,53.035) ; v1(24.536,61.366) DD15.2 ; v1(28.778,83.617) 30.836,85.674 v1(30.836,96.317) ; v1(28.931,133.274) 28.931,138.786 32.385,142.24 34.29,142.24 DD14.6
GND: C1.2 C2.2 C3.1 C4.2 C5.2 DD2.10 DD3.12 DD3.13 DD6.10 DD7.10 DD8.8 DD9.4 DD10.10 DD11.7 DD12.7 DD13.5 DD13.8 DD14.8 DD15.8 DD15.15 DD16.7 DD17.7 P1.2 XP1.6 XP1.7 XP1.14 XP1.30 XP1.61 XP2.2 XP2.19 XP2.21 XP2.22 XP2.24 XP2.26 XP2.28 XP2.30 XP2.40 | length 563.3
  Top w0.6: XP1.61 XP1.61@5.461,55.88 ; v1(9.398,55.88) XP1.61@5.461,55.88 ; v1(11.582,96.52) 12.197,96.52 ; DD17.7 13.97,12.522 ; DD13.8 13.496,48.734 12.208,48.734 12.208,54.118 DD13.5 13.132,56.718 12.675,56.718 11.989,57.404 11.989,59.284 12.128,59.423 12.128,79.438 DD12.7 12.522,82.728 12.522,89.357 13.335,90.17 15.232,90.17 15.232,92.346 14.868,92.71 13.106,92.71 12.197,93.62 12.197,96.52 ; DD2.10 12.197,99.827 12.197,96.52 ; v1(17.602,120.955) 17.471,121.086 17.471,130.112 17.78,130.42 DD3.12 ; DD11.7 21.412,5.08 ; v1(33.02,70.307) 33.02,64.77 DD15.15 ; DD3.13 31.75,132.08 31.75,133.985 32.385,134.62 34.036,134.62 36.22,136.804 36.22,139.09 DD14.8 34.747,144.323 34.747,151.384 33.731,152.4 32.385,152.4 31.75,153.035 31.75,180.34 C3.1 ; DD9.4 37.608,6.842 37.608,19.828 DD16.7 37.608,23.352 37.608,41.418 DD10.10 ; C2.2 38.1,176.53 38.1,184.15 C5.2 ; v1(41.148,82.55) 42.425,82.55 43.172,83.297 43.172,85.082 XP2.30 XP2.28 XP2.26 XP2.24 XP2.22 46.212,98.282 46.212,106.452 46.712,106.952 46.712,115.196 46.212,115.696 46.212,120.158 XP2.2 ; XP2.21 XP2.19 ; XP1.61@5.461,55.88 9.779,55.88 9.957,55.702 9.957,16.535 13.97,12.522 ; 13.97,12.522 13.97,7.62 16.51,5.08 21.412,5.08 ; 13.97,12.522 21.412,5.08
  Bottom w0.6: XP1.30 XP1.30@6.35,55.88 ; XP1.14 v1(11.582,96.52) ; XP1.7 XP1.6 8.89,116.84 12.7,120.65 17.297,120.65 v1(17.602,120.955) ; XP1.30@7.239,55.88 v1(9.398,55.88) ; C1.2 C4.2 13.97,134.62 DD3.12 18.42,130.17 32.38,130.17 DD3.13 39.33,124.501 43.403,124.501 44.45,123.453 XP2.2 ; DD13.8 17.712,48.26 18.982,46.99 25.4,46.99 DD15.8 28.432,46.498 36.052,46.498 DD10.10 ; DD2.10 17.747,101.6 19.017,100.33 25.4,100.33 DD7.10 28.188,100.082 30.522,100.082 30.787,99.817 38.449,99.817 38.752,99.513 41.132,99.513 41.457,99.513 XP2.19 ; P1.2 29.159,185.354 29.225,185.42 C3.1 C5.2 ; DD11.7 28.432,3.318 35.703,3.318 37.465,5.08 DD9.4 ; DD8.8 30.48,21.59 DD16.7 ; DD6.10 28.036,72.295 ; v1(33.02,70.307) 31.039,72.288 ; v1(41.148,82.55) 40.132,81.534 40.132,76.555 ; XP2.21 XP2.22 ; XP2.40 44.45,72.644 43.688,71.882 40.132,71.882 40.132,76.555 ; 28.036,72.295 31.033,72.295 31.039,72.288 ; 28.036,72.295 28.042,72.288 31.039,72.288 ; 31.039,72.288 34.703,72.288 36.868,74.453 36.868,78.219 38.468,78.219 40.132,76.555
IORDY: DD17.12 XP2.27 | length 137.6
  Top w0.3: DD17.12 20.472,31.902 20.472,24.384 20.879,23.978 24.359,23.978 26.365,21.971 30.836,21.971 32.664,20.142 32.664,5.004 34.29,3.378 39.802,3.378 40.488,4.064 40.488,13.818 38.258,16.047 38.258,18.898 41.262,21.902 41.262,39.929 44.313,42.979 44.313,60.891 42.545,62.659 42.545,70.409 40.284,72.669 40.284,87.274 XP2.27
IORGE: DD17.8 XP1.13 | length 112.6
  Top w0.3: v1(29.718,31.725) 31.852,33.858 31.852,41.003 31.926,41.078 31.926,44.8 31.378,45.348 31.378,56.041 32.969,57.633 v1(32.969,63.094) ; v1(31.064,76.505) 31.648,75.921 v1(31.648,65.507)
  Bottom w0.3: XP1.13 8.255,99.06 8.56,99.365 15.596,99.365 16.078,98.882 16.078,90.424 18.872,87.63 23.52,87.63 24.257,86.893 24.257,84.074 25.756,82.575 29.972,82.575 29.972,78.156 31.064,77.064 v1(31.064,76.505) ; DD17.8 21.59,23.673 21.082,23.673 20.472,24.282 20.472,31.725 v1(29.718,31.725) ; v1(31.648,65.507) 32.624,64.531 33.162,64.531 33.162,63.287 v1(32.969,63.094)
IORQ: DD16.1 XP1.48 | length 93
  Top w0.3: XP1.48 8.89,88.9 10.82,86.97 10.82,64.16 10.617,63.957 10.617,46.66 10.795,46.482 v1(14.478,46.482)
  Bottom w0.3: v1(14.478,46.482) 16.485,44.475 19.685,44.475 20.345,43.815 20.345,40.259 21.184,39.421 22.727,39.421 25.058,41.752 27.782,41.752 32.552,36.982 35.402,36.982 35.402,34.448 36.83,33.02 40.488,33.02 40.488,35.712 DD16.1
IRQ1: DD10.17 XP2.31 | length 39.4
  Top w0.3: DD10.17 45.872,57.302 45.872,54.762 47.701,54.762 48.902,55.963 48.902,78.428 v1(47.777,79.553)
  Bottom w0.3: XP2.31 43.332,82.398 45.034,82.398 47.777,79.654 v1(47.777,79.553)
M1: DD12.12 XP1.55 | length 31.5
  Top w0.3: XP1.55 v1(10.084,71.12) ; v1(19.51,81.602) 20.478,82.571 20.478,90.328 DD12.12
  Bottom w0.3: v1(10.084,71.12) 10.084,73.358 18.328,81.602 v1(19.51,81.602)
NetC1_1: C1.1 DD3.2 ZQ1.2 | length 18
  Top w0.3: C1.1 11.43,157.4 ZQ1.2
  Bottom w0.3: ZQ1.2 15.16,156.21 DD3.2
NetC2_2: C2.1 C3.2 DD3.24 R6.1 VD11.2 VD12.2 | length 29.5
  Top w0.3: DD3.24 33.807,158.75 35.76,160.703 35.76,161.49 VD12.2 36.83,167.64 R6.1 C2.1 C3.2
  Bottom w0.3: VD12.2 VD11.2
NetC4_1: C4.1 DD3.3 ZQ1.1 | length 12
  Top w0.3: ZQ1.1 12.7,148.59 C4.1
  Bottom w0.3: ZQ1.1 DD3.3
NetC5_1: C5.1 DD3.22 R6.2 | length 31.7
  Top w0.3: DD3.22 36.371,157.021 36.371,160.86 37.213,160.86 40.488,164.135 40.488,169.062 R6.2 40.589,171.399 40.589,179.121 C5.1
NetDD8_10: DD8.10 R4.2 | length 19.9
  Top w0.3: v1(43.79,27.94) 43.79,18.44 R4.2
  Bottom w0.3: DD8.10 v1(43.79,27.94)
NetDD11_1: DD11.1 DD16.3 | length 56.7
  Top w0.3: v1(19.812,36.932) 19.812,19.939 23.393,16.358 27.788,16.358 27.788,19.202 DD11.1
  Bottom w0.3: v1(19.812,36.932) 24.609,36.932 25.558,37.881 25.558,39.292 27.782,39.292 27.782,36.932 32.964,31.75 DD16.3
NetDD11_2: DD11.2 DD12.1 | length 106.3
  Top w0.3: DD12.1 15.048,96.52 17.306,94.262 17.306,79.214 17.78,78.74 17.78,69.547 19.329,67.998 19.329,46.177 17.932,44.78 17.932,27.838 18.11,27.661 18.11,20.168 24.155,14.122 27.127,14.122 28.804,15.799 28.804,20.574 27.94,21.438 25.552,21.438 25.552,18.898 DD11.2
NetDD11_3: DD11.3 DD16.6 | length 27.7
  Bottom w0.3: DD11.3 26.67,14.453 32.853,14.453 33.178,14.128 35.382,14.128 35.382,14.834 36.474,15.926 42.291,15.926 43.028,16.662 43.028,20.472 DD16.6
NetDD11_4: DD11.4 DD12.2 | length 90.9
  Top w0.3: DD12.2 14.905,93.98 15.882,93.003 15.882,89.528 15.24,88.886 15.24,69.469 16.353,68.356 16.353,48.894 16.898,48.349 16.898,45.332 15.392,43.826 15.392,39.712 15.582,39.522 15.582,26.822 17.602,24.802 17.602,18.339 23.241,12.7 DD11.4
NetDD11_8: DD11.8 DD16.12 | length 39.6
  Top w0.3: v1(45.872,14.173) 45.872,18.872 48.102,21.102 48.102,30.638 DD16.12
  Bottom w0.3: DD11.8 33.172,6.198 33.172,11.43 43.129,11.43 v1(45.872,14.173)
NetDD11_11: DD11.11 DD14.12 | length 153.9
  Top w0.3: v1(42.068,144.938) 42.068,135.032 44.425,135.032 44.602,134.854 44.602,130.073 44.958,129.718 v1(44.958,129.388)
  Bottom w0.3: DD11.11 36.195,12.7 38.71,15.215 44.145,15.215 45.695,16.764 45.695,24.587 46.355,25.248 47.269,25.248 48.946,26.924 48.946,127.762 47.32,129.388 v1(44.958,129.388) ; v1(42.068,144.938) DD14.12
NetDD11_12: DD11.12 DD17.5 | length 31.6
  Top w0.3: DD17.5 14.529,27.381 15.088,26.512 v1(15.088,16.485)
  Bottom w0.3: v1(15.088,16.485) 33.045,16.485 DD11.12
NetDD13_7: DD13.7 R2.2 | length 20.6
  Top w0.3: DD13.7 15.809,52.639 15.809,68.011 R2.2
NetDD13_9: DD13.9 R1.2 | length 25
  Top w0.3: R1.2 18.676,67.684 v1(18.676,48.895)
  Bottom w0.3: v1(18.676,48.895) 20.955,48.895 DD13.9
NetDD13_14: DD13.14 VD10.2 | length 10
  Top w0.3: DD13.14 20.217,62.333 20.217,68.477 VD10.2
NetDD13_15: DD13.15 VD9.2 | length 11.7
  Top w0.3: VD9.2 20.168,70.968 22.174,70.968 22.702,70.44 22.702,65.405 21.59,64.293 DD13.15
NetDD14_1: DD14.1 DD16.8 | length 145.6
  Top w0.3: DD14.1 43.942,152.908 43.942,140.742 47.362,137.321 47.362,87.427 45.568,85.632 45.568,82.487 43.879,82.487 43.332,81.94 43.332,72.339 44.356,71.316 44.356,68.758 44.069,68.471 44.069,65.334 45.126,64.277 45.126,61.498 44.856,61.229 44.856,23.724 DD16.8
NetDD14_4: DD14.4 VD1.2 VD3.2 VD5.2 VD7.2 | length 25.3
  Top w0.3: VD7.2 VD5.2 VD3.2 VD1.2 40.894,138.938 40.894,148.456 DD14.4
NetDD14_5: DD14.5 VD2.2 VD4.2 VD6.2 VD8.2 | length 33.7
  Top w0.3: DD14.5 36.982,149.708 36.982,152.484 39.479,152.484 42.926,149.037 42.926,138.938 VD2.2 VD4.2 VD6.2 VD8.2
NetDD17_3: DD17.3 R3.2 | length 13.8
  Top w0.3: DD17.3 15.082,34.132 15.082,39.218 14.732,39.568 v1(14.732,41.046)
  Bottom w0.3: v1(14.732,41.046) 16.916,41.046 R3.2
NetDD17_6: DD17.6 R5.1 | length 19.1
  Top w0.3: DD17.6 12.344,27.026 12.344,41.554 R5.1
NetP1_1: P1.1 VD12.1 | length 15.3
  Bottom w0.3: P1.1 29.058,165.354 29.312,165.1 VD12.1
NetR7_1: R7.1 VD13.1 | length 5.1
  Top w0.3: R7.1 VD13.1
NetVD13_2: VD13.2 XP2.39 | length 120.3
  Top w0.3: VD13.2 49.006,182.134 49.006,81.965 v1(47.966,80.924)
  Bottom w0.3: XP2.39 42.838,74.588 42.838,75.272 43.332,75.767 43.332,77.569 46.531,77.569 47.127,76.972 48.428,76.972 48.428,80.463 v1(47.966,80.924)
R/W: DD3.15 DD14.11 | length 22.1
  Bottom w0.3: DD3.15 35.331,138.201 45.085,138.201 46.838,139.954 46.838,144.932 DD14.11
RD: DD15.1 DD16.13 XP1.49 | length 93.2
  Top w0.3: XP1.49 7.569,86.36 v1(9.804,84.125) ; DD15.1 26.67,70.485 27.864,71.679 v1(27.864,79.883) ; v1(31.217,42.545) 30.878,42.884 30.878,56.532 32.319,57.973 32.319,63.688 v1(32.512,63.881)
  Bottom w0.3: v1(9.804,84.125) 13.31,87.63 15.24,87.63 20.168,82.702 22.708,82.702 22.708,81.305 24.13,79.883 v1(27.864,79.883) ; DD15.1 29.591,66.04 31.75,63.881 v1(32.512,63.881) ; v1(31.217,42.545) 32.01,41.752 35.382,41.752 36.824,40.31 41.504,40.31 46.101,35.712 46.99,35.712 DD16.13
RD_HI: DD6.1 DD13.12 | length 45.7
  Top w0.3: DD13.12 22.437,55.88 23.902,57.345 23.902,57.642 24.259,57.998 24.259,59.944 25.364,61.05 25.364,62.016 24.202,63.179 24.202,91.224 24.058,91.368 24.058,94.963 v1(23.698,95.322)
  Bottom w0.3: v1(23.698,95.322) 24.896,96.52 DD6.1
RD_SYS: DD10.19 DD13.10 | length 42.4
  Bottom w0.3: DD13.10 22.708,49.682 31.206,49.682 33.741,47.148 40.341,47.148 43.713,50.521 43.713,61.127 43.612,61.229 43.612,64.013 43.876,64.277 46.213,64.277 DD10.19
RES: DD3.18 XP1.20 | length 79.6
  Top w0.3: v1(15.088,98.712) 17.864,101.489 17.864,107.586 18.314,108.036 18.314,117.018 18.771,117.475 18.771,129.402 31.456,142.088 33.02,142.088 DD3.18
  Bottom w0.3: XP1.20 7.874,81.28 9.059,82.465 9.059,84.875 9.576,84.875 9.576,93.37 11.43,95.225 15.088,95.225 v1(15.088,98.712)
RESET: DD8.2 XP2.1 | length 115.6
  Top w0.3: v1(24.892,123.038) 24.892,126.086 29.249,126.086 30.825,124.509 30.825,98.552 30.186,97.912 30.186,94.666 30.658,94.194 30.658,80.366 29.634,79.342 29.634,76.288 30.455,75.468 30.455,59.745 27.707,56.998 26.168,56.998 25.552,56.382 25.552,41.758 DD8.2
  Bottom w0.3: v1(24.892,123.038) 40.792,123.038 XP2.1
RFSH: XP1.56
RTC: DD11.9 DD14.15 R8.1 VD9.1 VD10.1 | length 235.9
  Top w0.3: v1(11.252,18.898) 11.252,43.891 v1(12.852,45.491) ; v1(17.526,56.413) 18.176,57.064 18.176,67.244 v1(17.78,67.64) ; VD9.1 19.05,78.291 17.806,79.535 17.806,99.626 18.618,100.439 18.618,106.883 19.964,108.229 19.964,128.448 v1(22.504,130.988)
  Bottom w0.3: v1(11.252,18.898) 16.51,18.898 ; v1(12.852,45.491) 12.352,45.991 12.352,50.063 12.852,50.563 12.852,52.045 14.707,52.045 17.526,54.864 v1(17.526,56.413) ; v1(17.78,67.64) 17.78,71.12 VD9.1 VD10.1 ; v1(22.504,130.988) 23.495,131.978 33.782,131.978 35.124,133.32 35.124,136.393 36.068,137.338 46.457,137.338 47.803,138.684 47.803,154.127 DD14.15 ; DD11.9 35.408,6.502 35.408,3.968 33.172,3.968 28.473,8.667 28.473,12.954 27.534,13.894 16.358,13.894 14.427,15.824 14.427,16.815 16.51,18.898 ; R8.1 38.252,18.898 16.51,18.898
SCL: DD8.15 DD9.6 | length 42.6
  Top w0.3: v1(42.139,38.302) 42.139,20.161 40.798,18.82 40.798,17.063 41.199,16.662 41.199,13.411 DD9.6
  Bottom w0.3: DD8.15 35.204,39.726 40.715,39.726 v1(42.139,38.302)
SDA: DD9.5 DD10.15 R4.1 | length 50.5
  Top w0.3: DD9.5 48.108,6.198 48.108,16.662 R4.1 48.602,19.392 48.602,51.728 DD10.15
SW: DD8.5 DD11.13 DD14.14 DD17.2 | length 201.9
  Top w0.3: v1(16.51,107.823) 15.088,106.401 15.088,100.279 12.852,98.044 12.852,95.098 15.646,95.098 16.789,93.955 v1(16.789,75.616) ; v1(23.825,123.038) 23.825,127.127 24.663,127.965 24.663,131.14 v1(26.568,133.045) ; v1(24.867,68.326) v1(24.867,75.616) ; v1(25.73,36.627) 25.558,36.799 25.558,39.974 24.943,40.589 24.943,56.86 25.259,57.176 25.259,58.888 26.035,59.665 26.924,59.665 28.575,61.316 v1(28.575,68.326) ; DD8.5 27.432,33.02 33.782,26.67 35.408,26.67 35.408,18.898 DD11.13
  Bottom w0.3: DD17.2 15.24,34.29 25.552,34.29 ; v1(16.51,107.823) 18.263,109.576 18.263,122.58 18.72,123.038 v1(23.825,123.038) ; v1(16.789,75.616) v1(24.867,75.616) ; v1(24.867,68.326) v1(28.575,68.326) ; v1(25.73,36.627) 25.552,36.449 25.552,34.29 ; v1(26.568,133.045) 26.568,146.964 29.616,150.012 46.558,150.012 47.295,150.749 47.295,153.67 DD14.14 ; 25.552,34.29 DD8.5 25.552,34.138 25.552,34.29
WAIT: DD17.11 XP1.52 | length 63.3
  Top w0.3: XP1.52 8.763,78.74 9.423,78.08 v1(9.423,73.533) ; v1(12.802,58.014) 12.802,67.97 v1(12.929,68.097) ; v1(20.472,55.11) 20.472,34.695 21.029,34.138 22.702,34.138 22.702,31.592 DD17.11
  Bottom w0.3: v1(9.423,73.533) 9.423,70.739 12.065,68.097 v1(12.929,68.097) ; v1(12.802,58.014) 13.749,57.067 18.516,57.067 v1(20.472,55.11)
WP: DD8.12 DD9.7 | length 50.2
  Top w0.3: DD8.12 33.172,33.02 33.172,29.21 34.593,29.21 35.916,27.887 35.916,12.09 35.408,11.582 33.172,11.582 33.172,6.477 35.408,6.477 v1(37.846,4.039)
  Bottom w0.3: v1(37.846,4.039) 37.846,3.48 40.31,3.48 DD9.7
WR: DD13.1 DD14.13 DD15.7 | length 177.7
  Top w0.3: v1(40.488,49.682) 40.488,58.572 ; v1(41.656,59.741) 40.488,58.572 ; v1(43.079,151.13) 39.345,154.864 37.414,154.864 36.474,153.924 36.474,148.615 37.922,147.168 39.624,147.168 39.624,139.909 36.982,137.267 36.982,124.714 35.611,123.342 33.178,123.342 33.178,120.802 34.595,120.802 36.449,118.948 36.449,112.573 37.795,111.227 37.795,110.084 38.004,109.875 38.004,105.232 39.776,103.459 39.776,72.161 40.919,71.018 40.919,69.621 40.996,69.545 40.996,59.309 40.488,58.801 40.488,58.572
  Bottom w0.3: DD13.1 16.561,63.449 18.72,63.449 20.193,64.922 28.016,64.922 30.556,62.382 35.402,62.382 37.637,64.618 40.792,64.618 41.656,63.754 v1(41.656,59.741) ; DD15.7 32.283,50.8 33.401,49.682 v1(40.488,49.682) ; v1(43.079,151.13) DD14.13
WR_HI: DD7.11 DD13.13 | length 62.2
  Top w0.3: v1(18.948,92.227) 18.306,91.585 18.306,79.84 23.202,74.944 23.202,64.706 22.758,64.262 22.758,59.588 DD13.13 ; v1(33.884,98.425) 34.29,98.831 DD7.11
  Bottom w0.3: v1(18.948,92.227) 18.948,98.76 19.187,98.999 20.478,98.999 20.899,98.577 24.08,98.577 24.435,98.932 28.727,98.932 29.082,98.577 33.731,98.577 v1(33.884,98.425)
WR_SYS: DD8.9 DD13.11 | length 37.1
  Top w0.3: DD13.11 23.099,51.831 23.099,40.241 24.558,38.782 24.558,28.452 26.365,26.645 33.045,26.645 DD8.9
pads on no net: DD3.1 DD3.16 DD3.19 DD3.20 DD3.21 DD3.23 DD8.7 DD9.1 DD9.2 DD9.3 DD10.8 DD10.11 DD10.12 DD10.13 DD11.5 DD11.6 DD12.9 DD12.10 DD12.13 DD14.7 DD14.9 XP1.1 XP1.5 XP1.8 XP1.12 XP1.15 XP1.16 XP1.17 XP1.18 XP1.19 XP1.24 XP1.25 XP1.26 XP1.31 XP1.35 XP1.36 XP1.44 XP1.45 XP1.46 XP1.47 XP1.50 XP1.51 XP1.53 XP1.54 XP1.60 XP1.62 XP2.20 XP2.29 XP2.32 XP2.34 XP2.36

## Polygon pours and split planes (outlines as drawn)
GND on Bottom "Bottom-No Net" (solid, pour order 2): 9.398,192.532 49.022,192.532 49.022,0.508 9.398,0.508

## Silkscreen, mask and mechanical layers (free items; w line width, h text height)
Outline:
  lines w0.254: 0,50.8 8.89,50.8 8.89,0 49.53,0 49.53,193.04 8.89,193.04 8.89,132.08 0,132.08 0,50.8